# Altium PCB IoTC2.PcbDoc
Units mil, origin at the board's own origin, x right, y up, seen from the top; angles counter-clockwise.
Board outline 3295 x 3855 mil, 2 copper layers (Top Layer, Bottom Layer); 51 components, 63 nets, 229 pads, 85 vias.
Unrouted connection lines stored in the file: 2.
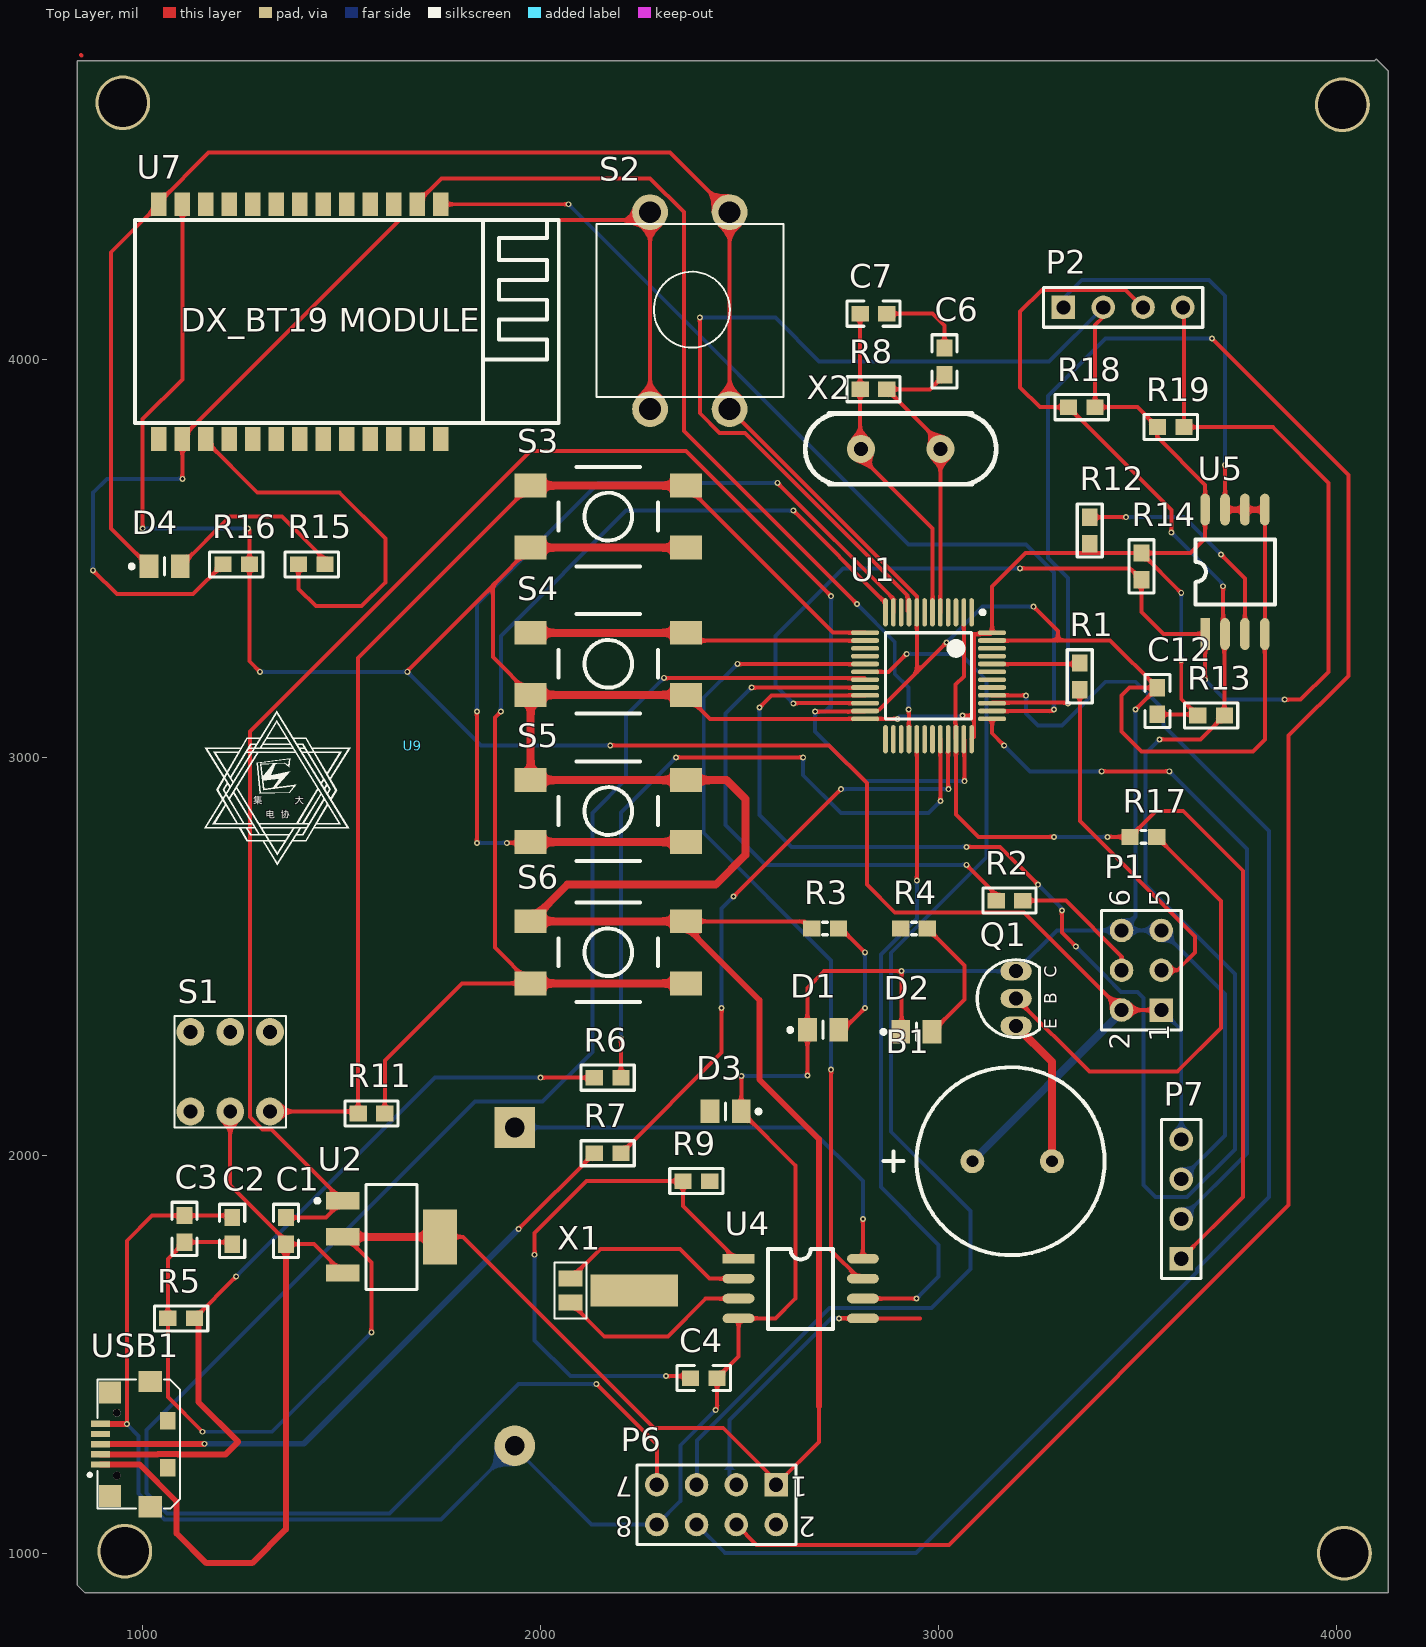
[diagram p0: Top Layer view]
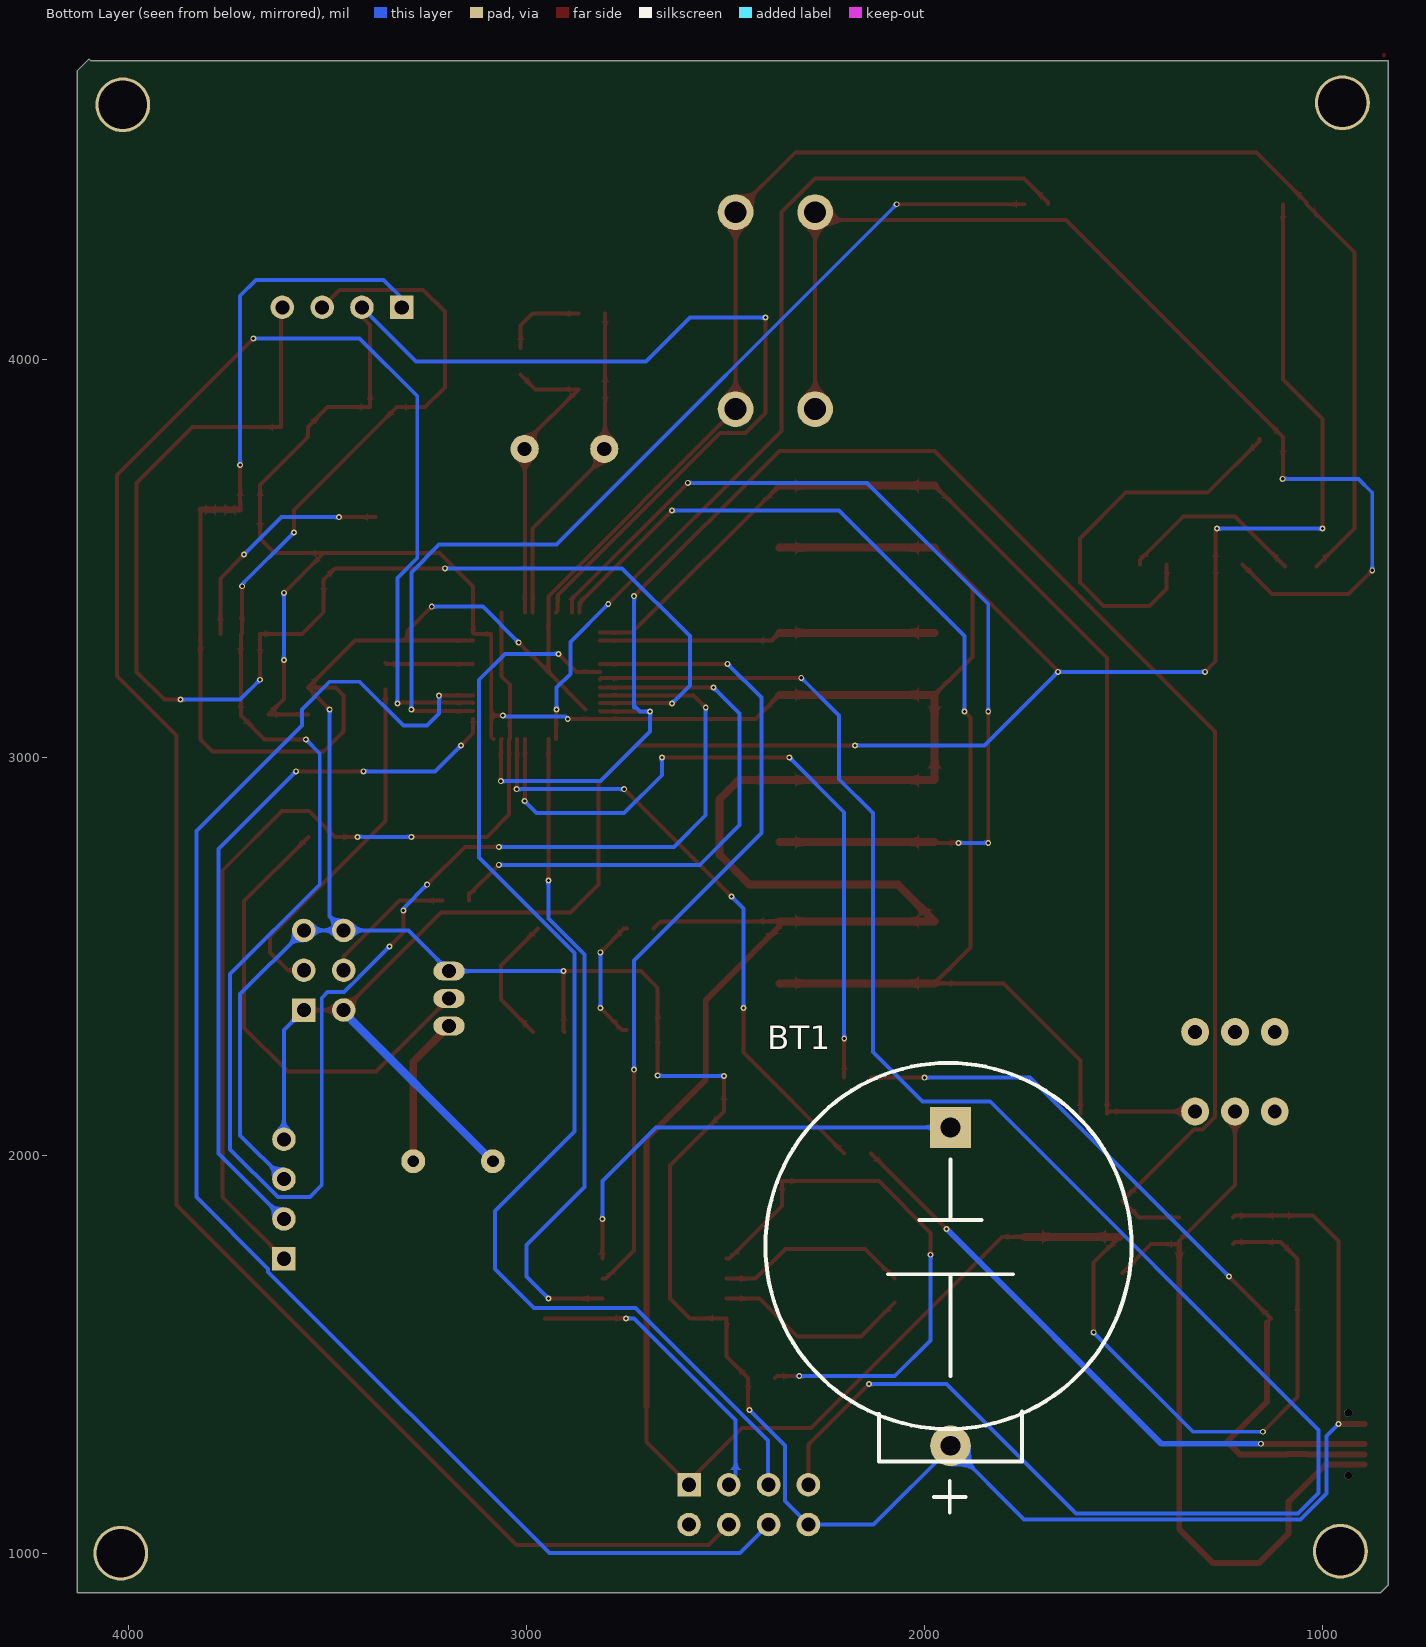
[diagram p1: Bottom Layer view, seen from below]
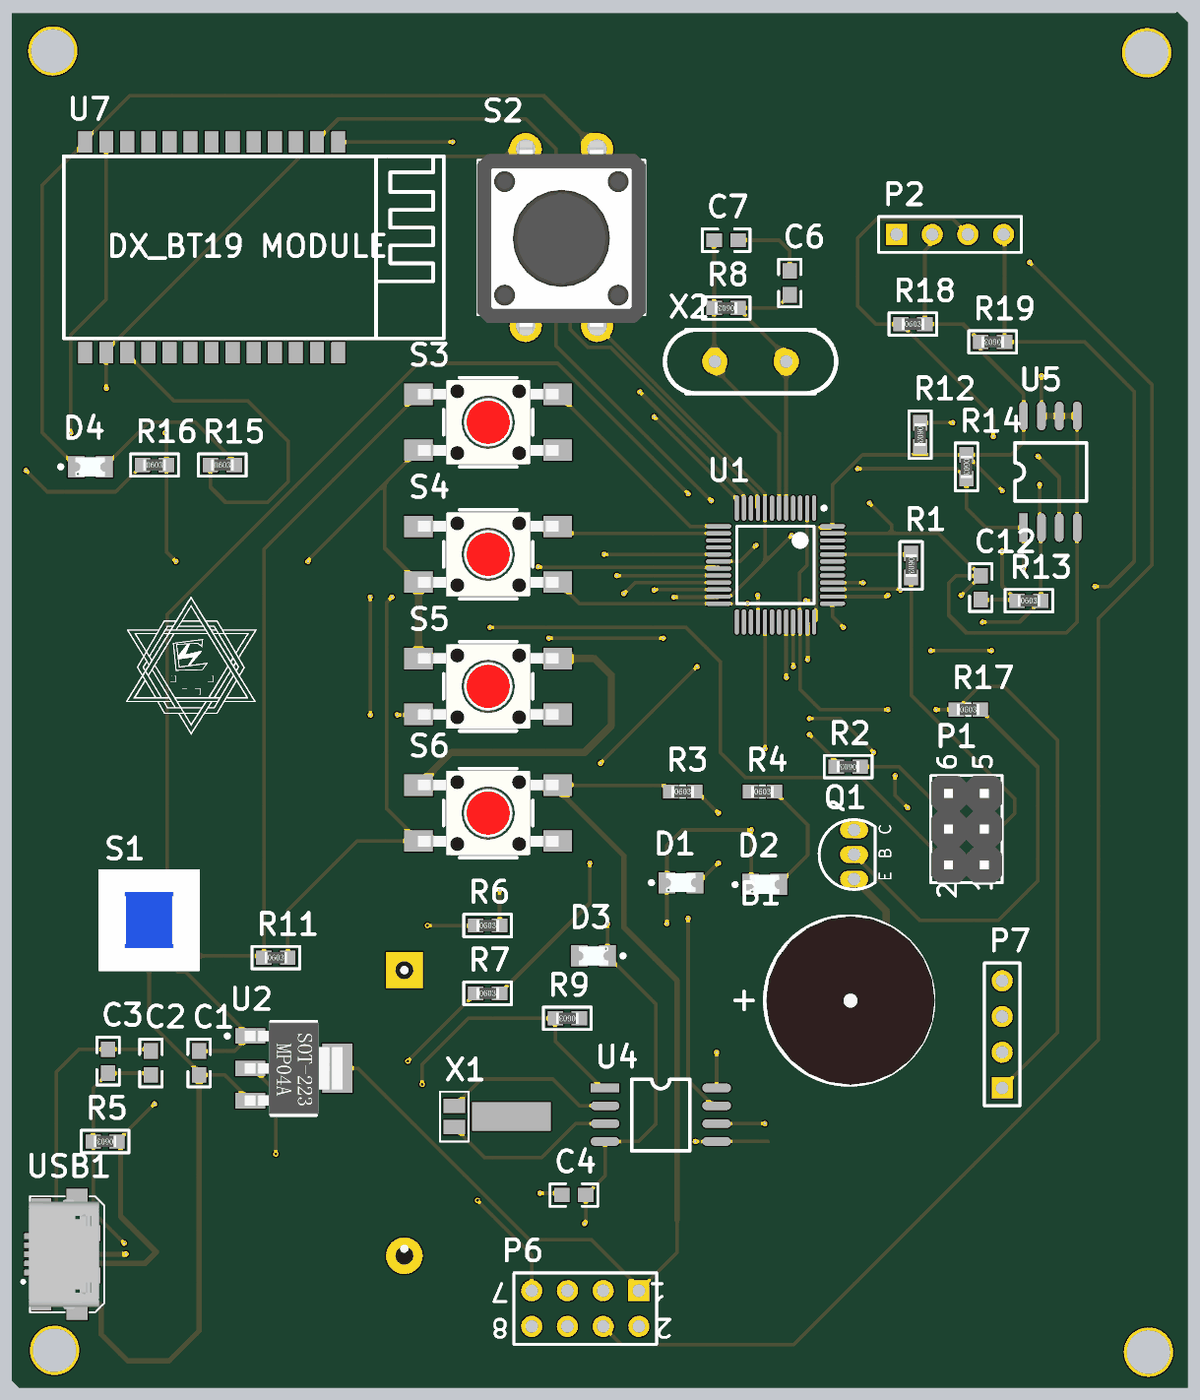
[diagram p2: 3D render of the assembled board from above, using the file's embedded part models]

## Layer stack, top to bottom
Top Solder: solder mask 0.4, Solder Resist, Dk 3.5
Top Layer: signal copper 1.4
Dielectric 1: dielectric 12.6, FR-4, Dk 4.8
Bottom Layer: signal copper 1.4
Bottom Solder: solder mask 0.4, Solder Resist, Dk 3.5

## Board outline
835,4750 4065,4750 4095,4750 4100,4755 4130,4725 4130,900 855,900 835,920

## Design rules (kind name [scope] priority, off if disabled: settings)
Clearance [All] p1: gap=5
HoleToHoleClearance [All] p1: gap=5 allowstackedmicrovias=TRUE
MinimumSolderMaskSliver [All] p1: minsoldermaskwidth=5
PolygonConnect [All] p1: connectstyle=Relief reliefconductorwidth=10 reliefentries=4 polygonreliefangle="90 Angle" airgapwidth=10
RoutingVias [All] p1: holewidth=28 width=50 viastyle="Through Hole" minholewidth=28 minwidth=50 maxholewidth=28 maxwidth=50
SilkToSilkClearance [All] p1: silktosilkclearance=5
SilkToSolderMaskClearance [IsPad] p1: minsilkscreentomaskgap=5 clearancetoexposedcopper=TRUE
SolderMaskExpansion [All] p1: expansion=4
Width [All] p1: maxlimit=50 minlimit=10 preferedwidth=10
26 further rules are at their usual default settings.

## Components (designator, comment, footprint, x,y, rotation, side; value= is the part's Value field where it differs from the comment)
B1 "Buzzer" BUZZER 3185,1985 r270 top
BT1 "3V" BAT-CR2032 1935,1670 r180 bottom
C1 "104" CAPC1608[0603]S 1360,1810 r270 top
C2 "104" CAPC1608[0603]S 1225,1810 r270 top
C3 "104" CAPC1608[0603]S 1105,1815 r270 top
C4 "104" CAPC1608[0603]S 2410,1440 r180 top
C6 "20p" CAPC1608[0603]S 3015,3995 r270 top
C7 "20p" CAPC1608[0603]S 2836.54,4115 r180 top
C12 "104" CAPC1608[0603]S 3550,3141.54 r90 top
D1 "Red" LEDC2012(0805) 2710,2315 r0 top
D2 "Red" LEDC2012(0805) 2944.37,2310 r0 top
D3 "Red" LEDC2012(0805) 2465,2110 r180 top
D4 "Red" LEDC2012(0805) 1055,3480 r0 top
P1 "BOOT MODE" HDR2X3 3560,2365 r90 top
P2 "Comment" HDR1X4 3314,4131 r0 top
P6 "Comment" HDR2X4 2592,1172 r180 top
P7 "Header 4" HDR1X4 3610,1740 r90 top
Q1 "S8550" TO-92B 3195,2394.9 r0 top
R1 "100K" RESC1608[0603]S 3355,3203.46 r270 top
R2 "1K" RESC1608[0603]S 3178.46,2640 r180 top
R3 "1K" RESC1608[0603] 2715,2570 r0 top
R4 "1K" RESC1608[0603] 2938.46,2570 r0 top
R5 "1.5K" RESC1608[0603]S 1096.54,1590 r180 top
R6 "10" RESC1608[0603]S 2168.46,2195 r0 top
R7 "10" RESC1608[0603]S 2168.46,2005 r0 top
R8 "1M" RESC1608[0603]S 2836.54,3925 r180 top
R9 "2K" RESC1608[0603]S 2391.54,1935 r180 top
R11 "1K" RESC1608[0603]S 1575,2105 r0 top
R12 "10K" RESC1608[0603]S 3380,3570 r270 top
R13 "10K" RESC1608[0603]S 3685,3105 r0 top
R14 "10K" RESC1608[0603]S 3510,3480 r270 top
R15 "330" RESC1608[0603]S 1425,3485 r0 top
R16 "10K" RESC1608[0603]S 1235,3485 r0 top
R17 "1K" RESC1608[0603] 3515,2800 r0 top
R18 "10K" RESC1608[0603]S 3360,3880 r0 top
R19 "10K" RESC1608[0603]S 3583.46,3830 r180 top
S1 "HEXAGON SELF-LOCKING SWITCH" 六脚开关 1120,2110 r90 top
S2 "SWITCH" 大复位按键 2275,3875 r90 top
S3 "SWITCH" 贴片复位开关 2170,3605 r0 top
S4 "SWITCH" 贴片复位开关 2170,3235 r0 top
S5 "SWITCH" 贴片复位开关 2170,2865 r180 top
S6 "SWITCH" 贴片复位开关 2170,2510 r180 top
U1 "STM32F103C8T6" 48P 2975,3205 r270 top
U2 "AMS1117_3.3V" SOT223 1625,1795 r0 top
U4 "DS1302" SO-8M 2497.4,1740 r0 top
U5 "LM75" SO-8M 3670,3310 r90 top
U7 "DX_BT19" DX_BT19 1895.64,4500 r270 top
U9 "电协logo" 电协logo 1679,3029 r0 top
USB1 "USB-5P" MICRO_USB 894,1274 r90 top
X1 "XTAL1" XTAL32-2 2075,1690 r270 top
X2 "XTAL2" XTAL1 3005,3775 r180 top

## Footprints (in the part's own frame and the unit in brackets; to place one, negate y for a bottom-side part, rotate by r counter-clockwise, add the part's x,y. Pads: shape width x height; smd on the part's side, far side on the other; paste and mask are expansions set on the pad)
48P [mm]
  oval 1.8x0.3 smd: 1(-4.05,2.75) 2(-4.05,2.25) 3(-4.05,1.75) 4(-4.05,1.25) 5(-4.05,0.75) 6(-4.05,0.25) 7(-4.05,-0.25) 8(-4.05,-0.75) 9(-4.05,-1.25) 10(-4.05,-1.75) 11(-4.05,-2.25) 12(-4.05,-2.75) 25(4.05,-2.75) 26(4.05,-2.25) 27(4.05,-1.75) 28(4.05,-1.25) 29(4.05,-0.75) 30(4.05,-0.25) 31(4.05,0.25) 32(4.05,0.75) 33(4.05,1.25) 34(4.05,1.75) 35(4.05,2.25) 36(4.05,2.75)
  oval 0.3x1.8 smd: 13(-2.75,-4.05) 14(-2.25,-4.05) 15(-1.75,-4.05) 16(-1.25,-4.05) 17(-0.75,-4.05) 18(-0.25,-4.05) 19(0.25,-4.05) 20(0.75,-4.05) 21(1.25,-4.05) 22(1.75,-4.05) 23(2.25,-4.05) 24(2.75,-4.05) 37(2.75,4.05) 38(2.25,4.05) 39(1.75,4.05) 40(1.25,4.05) 41(0.75,4.05) 42(0.25,4.05) 43(-0.25,4.05) 44(-0.75,4.05) 45(-1.25,4.05) 46(-1.75,4.05) 47(-2.25,4.05) 48(-2.75,4.05)
  silkscreen extent -4.17,-2.75 2.75,3.58, body extent -3.5,-3.5 3.5,3.5, height 1.6
BAT-CR2032 [mm] "CR2032电池座（未加焊）"
  round 2.6 hole 1.27: 1(0,-10.16)
  rect 2.6x2.6 hole 1.27: 2(0,10.16)
  silkscreen extent -11.81,-14.43 11.56,14.27, body extent -11.68,-11.18 11.68,14.22, height 3.5
BUZZER [mil]
  round 60 hole 30: 1(0,100) 2(0,-100)
  silkscreen extent -236,-323 236,232, body extent -236,-236 236,236, height 236
CAPC1608[0603]S [mm] "Chip Capacitor,Silkscreen Border,2-Leads, Body 1.60x0.80mm, IPC Medium Density"
  rect 1.1x1 smd: 1(-0.85,0) 2(0.85,0)
  silkscreen extent -1.7,-0.8 1.7,0.8, body extent -0.88,-0.48 0.87,0.47, height 0.85
DX_BT19 [mil]
  rect 60x39.37 smd: 1(110,-146.28) 2(110,-205.34) 3(110,-264.4) 4(110,-323.46) 5(110,-382.52) 6(110,-441.58) 7(110,-500.64) 8(110,-559.7) 9(110,-618.76) 10(110,-677.82) 11(110,-736.88) 12(110,-795.94) 13(110,-855) 14(700,-855) 15(700,-795.94) 16(700,-736.88) 17(700,-677.82) 18(700,-618.76) 19(700,-559.7) 20(700,-500.64) 21(700,-441.58) 22(700,-382.52) 23(700,-323.46) 24(700,-264.4) 25(700,-205.34) 26(700,-146.28)
  silkscreen extent 150,-915 660,150
HDR1X4 [mm] "Connector; Header; 4 Position"
  rect 1.5x1.5 hole 0.9: 1(0,0)
  round 1.5 hole 0.9: 2(2.54,0) 3(5.08,0) 4(7.62,0)
  silkscreen extent -1.27,-1.27 8.89,1.27
HDR2X3 [mm] "Connector; Header; 3x2 Position"
  rect 1.5x1.5 hole 0.9: 1(0,0)
  round 1.5 hole 0.9: 2(0,2.54) 3(2.54,0) 4(2.54,2.54) 5(5.08,0) 6(5.08,2.54)
  silkscreen extent -1.27,-1.27 6.35,3.81, body extent -1.27,-1.27 6.35,3.81, height 8.54
HDR2X4 [mm] "Connector; Header; 4x2 Position"
  rect 1.5x1.5 hole 0.9: 1(0,0)
  round 1.5 hole 0.9: 2(0,2.54) 3(2.54,0) 4(2.54,2.54) 5(5.08,0) 6(5.08,2.54) 7(7.62,0) 8(7.62,2.54)
  silkscreen extent -1.27,-1.27 8.89,3.81
LEDC2012(0805) [mm] "LED,Chip;2.00mm L X 1.25mm W X 1.20mm H"
  rect 1.2x1.5 smd: A(1,0) C(-1,0)
  silkscreen extent -2.22,-0.55 0,0.55, body extent -1.05,-0.68 1.05,0.67, height 1.2
MICRO_USB [mm]
  rect 1.35x1.5 smd: 0(-4,-3.16) 0(4,-3.16)
  rect 1.4x1.4 smd: 0(-3.3,-0.6) 0(3.3,-0.6)
  round 0.5 hole 0.5 paste+0 mask+0: 0(-2.007,-1.041) 0(2.007,-1.041)
  rect 1.1x1 smd: 0(-1.5,-4.3) 0(1.5,-4.3)
  rect 0.4x1.2 smd: 1(-1.3,0) 2(-0.65,0) 3(0,0) 4(0.65,0) 5(1.3,0)
  silkscreen extent -4.11,-5.08 4.11,0.79, body extent -3.9,-4.72 3.9,0.28, height 2.83
RESC1608[0603] [mm] "Chip Resistor, 2-Leads, Body 1.60x0.82mm, IPC Medium Density"
  rect 1.1x1 smd: 1(-0.85,0) 2(0.85,0)
  silkscreen extent -0.15,-0.4 0.15,0.4, body extent -0.8,-0.4 0.8,0.4, height 0.45
RESC1608[0603]S [mm] "Silkscreen Outside, Chip Resistor, 2-Leads, Body 1.60x0.82mm, IPC Medium Density"
  rect 1.1x1 smd: 1(-0.85,0) 2(0.85,0)
  silkscreen extent -1.7,-0.8 1.7,0.8, body extent -0.8,-0.4 0.8,0.4, height 0.45
SO-8M [mil]
  rect 80x24 smd: 1(0,0)
  oval 80x24 smd: 2(0,-50) 3(0,-100) 4(0,-150) 5(312.6,-150) 6(312.6,-100) 7(312.6,-50) 8(312.6,0)
  silkscreen extent 74,-176 237,24
SOT223 [mm]
  rect 2.15x1.1 smd: 1(-3.1,2.3) 2(-3.1,0) 3(-3.1,-2.3)
  rect 2.15x3.5 smd: 2(3.1,0)
  silkscreen extent -4.85,-3.35 1.63,3.35, body extent -3.48,-3.25 3.48,3.25, height 1.7
TO-92B [mm]
  oval 2x1.2 hole 0.9: 1(0,-1.775) 2(0,-0.025) 3(0,1.725)
  silkscreen extent -2.48,-2.51 1.5,2.46, body extent -2.48,-2.52 1.5,2.47, height 7
XTAL1 [mm]
  round 1.8 hole 0.9: 1(0,0) 2(5.08,0)
  silkscreen extent -3.56,-2.26 8.64,2.26
XTAL32-2 [mil]
  rect 80x220 smd: 0(30,160)
  rect 40x60 smd: 1(0,0) 2(60,0)
  silkscreen extent -40,-40 100,40
六脚开关 [mil]
  round 70 hole 35: 1(0,0) 2(0,-100) 3(0,-200) 4(200,-200) 5(200,-100) 6(200,0)
  silkscreen extent -40,-240 240,40, body extent -38,-238 238,38, height 512
大复位按键 [mil]
  round 90 hole 55: 1(0,0) 1(495,0) 2(0,-200) 2(495,-200)
  silkscreen extent 30,-335 465,135, body extent -28,-336 518,136, height 335
电协logo [mil]
  silkscreen extent -525,-300 -157,89
贴片复位开关 [mil]
  rect 80x60 smd: 1(-195,78) 1(195,78) 2(-195,-78) 2(195,-78)
  silkscreen extent -125,-125 125,125, body extent -197,-118 197,118, height 175

## Part data
BT1: library part "Battery Negtive", "Multicell Battery"
C1 C2 C3 C4 C6 C7 C12: library part "Cap Chip 2", "Chip Capacitor, Silkscreen Border"
D1 D2 D3 D4: library part "LED Chip", "Typical Chip LED"
P1: library part "Header 3X2", "Header, 3-Pin, Dual row"
P7: "Header, 4-Pin"
Q1: library part "PNP S8550", "Discrete PNP Bipolar Transistor"
R1 R2 R5 R6 R7 R8 R9 R11 R12 R13 R14 R15 R16 R18 R19: library part "Res Chip 2p 2", "Chip Resistor, Border Silkscreen On PCB Library"
R3 R4 R17: library part "Res Chip 2p 1", "Chip Resistor, PSpice Model, IPC PCB Library Drawing"
S1 U4 U5 U7 X1 X2: library part Component_1
S2 S3 S4 S5 S6: library part 轻触开关
U2: library part AMS1117, "POSITIVE OUTPUT VOLTAGE"
USB1: "微型USB母座"

## Free pads (board coordinates)
  round 137.8 hole 122.05: 0(950,4645) 0(955,1005) 0(4015,4640) 0(4020,1000)

## Via types
v1: diameter 15, hole 8, Top Layer to Bottom Layer, 85 vias

## Nets (pads, with @x,y where several pads share a name; then routed paths per layer and width w, separated by ;. In a path a pad name is that pad's centre, name@x,y a point inside that pad or via, vN(x,y) a via of type N, cw(c..) or ccw(c..) an arc to the next point about the centre after c; other vN are vias at no path point)
5V: C1.2 S1.2 U2.3 USB1.1 | length 1931.5
  Top Layer w10: S1.2 1220,1925 1360,1785 C1.2 1430.87,1776.54 U2.3
  Top Layer w15: USB1.1 992.18,1222.82 1085,1130 1085,1050 1160,975 1275,975 1360,1060 C1.2
BOOT0: R1.1 U1.44 | length 221.5
  Top Layer w10: U1.44 3352.6,3234.53 R1.1
BOOT1: R2.2 U1.20 | length 1425.2
  Top Layer w10: v1(2530.47,3175.47) U1.20 ; v1(3070,2730) 3145,2655 R2.2
  Bottom Layer w10: v1(2530.47,3175.47) 2465,3110 2465,2830 2565,2730 v1(3070,2730)
EN: P6.5 U1.18 | length 2966.9
  Top Layer w10: U1.18 2874.84,3214.84 v1(2920,3260)
  Bottom Layer w10: P6.5@2393,1195 2393,1283 2726,1616 2982,1616 3080,1714 3080,1860 2880,2060 2880,2508.79 3120,2748.79 3120,3195 3055,3260 v1(2920,3260)
GND: BT1.1 C1.1 C2.1 C3.1 C4.1 C12.2 D1.C D2.C D3.C D4.C P1.5 P1.6 P2.1 P6.8 P7.3 Q1.3 S2.2 U1.8 U1.23 U1.35 U1.47 U2.1 U4.4 U5.4 U5.5 U5.6 U5.7 U7.13 USB1.5 | length 18387.1
  Top Layer w10: v1@959.82,1325.18 v1(960,1325) 960,1785 1023.46,1848.46 C3.1 1220,1848.46 C2.1 ; D4.C 920,3575.63 920,4269.36 U7.13 1040.64,4394.77 1165.87,4520 2325,4520 2475,4370 2475,3875 2945.47,3404.53 U1.8 2945.47,3214 ; C1.1 1460.87,1843.46 U2.1 1323.5,2065 1301.36,2065 1270,2096.36 1270,3065 1975,3770 2365,3770 v1(2730,3405) ; v1(2440,1360) 2443.46,1363.46 C4.1 2497.4,1493.94 U4.4 2590,1590 2640,1640 2640,1974.37 D3.C v1(2504.37,2199.37) ; v1(2670.63,2200.63) D1.C 2670.63,2420.63 2712.8,2462.8 v1(2907.2,2462.8) 2907.2,2312.2 D2.C ; v1(2690,3115) 2814.13,3115 U1.23 ; 2851.67,3120.2 2945.47,3214 ; v1(3020,3288.53) 2945.47,3214 ; U1.35 3065,3044.13 v1(3065,2940) ; U1.47 3300,3293.58 ; v1(3238.53,3378.53) 3300,3317.06 3300,3293.58 ; v1(3495,3120) C12.2 ; U5.7 v1(3720,3735) ; U5.5 U5.4 3820,3045 3790,3015 3510,3015 3460,3065 3460,3155 3480,3175 C12.2 ; 3300,3293.58 3431.42,3293.58 C12.2
  Top Layer w15: USB1.5 v1@959.82,1325.18 ; U5.7 U5.6 U5.5
  Bottom Layer w10: v1(960,1325) 990,1295 990,1150 1055,1085 1750,1085 BT1.1 1935,1265 2128,1072 P6.8 2351,1131 2351,1271 v1(2440,1360) ; v1(2504.37,2199.37) 2669.37,2199.37 v1(2670.63,2200.63) ; v1(2730,3405) 2730,3125 2727.5,3127.5 2715,3115 v1(2690,3115) 2690,3065 2815,2940 v1(3065,2940) ; v1(2907.2,2462.8) Q1.3 3297.2,2565 P1.6 ; v1(3020,3288.53) 3110,3378.53 v1(3238.53,3378.53) ; P2.1@3310,4120 3310,4150 3360,4200 3680,4200 3720,4160 v1(3720,3735) ; v1(3495,3120) 3495,2600 P1.6 ; P7.3 3720,2050 3720,2405 P1.5 P1.6
I/O: U1.29 U4.6 | length 1660.9
  Top Layer w10: U4.6 v1(2945,1640) ; v1(2945.47,2690.47) U1.29
  Bottom Layer w10: v1(2945,1640) 3000,1695 3000,1775 2855,1920 2855,2505 2945.47,2595.47 v1(2945.47,2690.47)
IO0: P6.4 U1.39 | length 5603
  Top Layer w10: P6.4 2543,1021 3026,1021 3880,1875 3880,3055 4030,3205 4030,3710 v1(3687,4053) ; U1.39 3135.85,3137.5 3322.5,3137.5 v1(3325,3135)
  Bottom Layer w10: v1(3325,3135) 3325,3451.21 3275,3501.21 3275,3908 3420,4053 v1(3687,4053)
IO2: P6.6 U1.40 | length 3741
  Top Layer w10: U1.40 3219.21,3155.79 v1(3220,3155)
  Bottom Layer w10: P6.6 2464,1000 2943.2,1000 3649.53,1706.33 3649.53,1714.53 3830,1895 3830,2815 3565,3080 3565,3120 3495,3190 3420,3190 3310,3080 3250,3080 3220,3110 v1(3220,3155)
KEY1: R16.1 S2.1 U7.15 | length 2826.3
  Top Layer w10: v1(875,3470) 935,3410 1126.54,3410 R16.1 ; v1(1100,3700) 1099.7,3700.3 U7.15 1099.7,3804.77 1644.93,4350 2255,4350 2275,4370 S2.1@2275,3875
  Bottom Layer w10: v1(875,3470) 875,3665 910,3700 v1(1100,3700)
LM75_OS: B1.2 C2.2 C3.2 C12.1 P1.1 P1.2 P2.2 P6.1 P7.4 R3.1 R5.2 R12.2 R13.1 R14.1 R16.2 R18.2 R19.2 S3.2 S4.2 S5.2 S6.2 U1.9 U1.24 U1.36 U1.48 U2.2 U5.8 U7.12 | length 18522.3
  Top Layer w10: v1(1000,3575) 1000,3850 1099.7,3949.7 U7.12 ; v1(1150,1305.16) 1063.07,1392.09 R5.2 1063.07,1739.61 C3.2 1220,1781.54 C2.2 ; v1(1265,3575) 1268.46,3571.54 R16.2 1268.46,3241.54 v1(1295,3215) ; U2.2@1502.95,1795 1510,1795 1575,1730 v1(1575,1555) ; v1@1665,3217 1880,3432 ; U2.2@1747.05,1795 1805,1795 2285,1315 2459,1315 2596,1178 P6.1@2596,1176 ; S4.2@1975,3157 1880,3252 1880,3432 ; S3.2@1975,3527 1880,3432 ; v1(2175,3030) 2725,3030 2820,2935 2820,2680 2890,2610 3215,2610 P1.2 P1.1 ; S6.2@2365,2575 2365,2588 2663.54,2588 R3.1 ; S4.2@2365,3157 2425.27,3096.73 U1.24 v1(2896.73,3096.73) ; v1(2400,4105) 2400,3865 2450,3815 2513.79,3815 2922.01,3406.78 2922.01,3368.23 U1.9 ; P6.1 P6.1@2596,1176 ; P6.1@2596,1163 P6.1@2596,1176 ; 2699.25,1369.25 2699.25,1279.25 P6.1@2596,1176 ; v1(3060,3105) 3089.02,3105 ; U1.36 3089.02,3051.3 3089.02,3105 ; P2.2 3414,4107.07 3393.46,4086.54 R18.2 3500,3880 R19.2 3550,3805 3670,3685 U5.8 3670,3550 3633.46,3513.46 R14.1 ; C12.1 3648.46,3108.07 3610,3146.54 v1(3610,3245) ; v1(3610,3413.46) R14.1 ; 3089.02,3105 3089.02,3309.49 3130.67,3309.49 U1.48 3134.45,3429.2 3218.72,3513.46 R14.1
  Top Layer w15: S6.2@2365,2575 2550,2390 2550,2190 2699.25,2040.75 2699.25,1369.25
  Top Layer w20: U2.2@1510,1795 U2.2@1747.05,1795 ; S3.2@1975,3527 S3.2@2365,3527 ; S6.2@2365,2588 1975,2588 2067,2680 2440,2680 2515,2755 2515,2895 2467,2943 2365,2943 1975,2943 1975,3157 S4.2@2365,3157
  Bottom Layer w10: v1(1000,3575) v1(1265,3575) ; v1@1155,1305.16 1325.16,1305.16 v1(1575,1555) ; v1(1295,3215) v1(1665,3215) 1850,3030 v1(2175,3030) ; v1(2400,4105) 2590,4105 2700,3995 3278,3995 P2.2 ; v1(2896.73,3096.73) 2902.5,3102.5 3057.5,3102.5 v1(3060,3105) ; P1.2@3460,2360 P1.2 ; P1.1 3610,2315 P7.4 ; v1(3610,3245) v1(3610,3413.46)
  Bottom Layer w20: B1.2 P1.2@3460,2360
NetB1_1: B1.1 Q1.1 | length 377.3
  Top Layer w20: Q1.1 3285,2235 B1.1
NetBT1_2: BT1.2 U4.8 | length 1133
  Top Layer w10: U4.8 v1(2810,1840)
  Bottom Layer w10: BT1.2@1930,2065 BT1.2 2675,2070 2810,1935 v1(2810,1840)
NetC4_2: C4.2 R9.2 U4.1 | length 1389.9
  Top Layer w10: v1(1985,1750) 1985,1805 2115,1935 R9.2 2358.07,1871.93 2490,1740 U4.1 ; v1(2315,1445) 2371.54,1445 C4.2
  Bottom Layer w10: v1(1985,1750) 1985,1535 2075,1445 v1(2315,1445) v1@2320,1445
NetC6_1: C6.1 C7.1 | length 214
  Top Layer w10: C7.1 2985,4115 3015,4085 C6.1
NetD1_A: D1.A R3.2 | length 319.8
  Top Layer w10: R3.2 2755,2570 v1(2815,2510) ; D1.A 2760,2315 v1(2815,2370)
  Bottom Layer w10: v1(2815,2370) v1(2815,2510)
NetD2_A: D2.A R4.2 | length 332.2
  Top Layer w10: R4.2 3065,2476.93 3065,2391.26 D2.A
NetD3_A: D3.A R9.1
NetD4_A: D4.A R15.2 | length 472.3
  Top Layer w10: D4.A 1219.37,3605 1350,3605 1458.46,3496.54 R15.2
NetP1_3: P1.3 R1.2 | length 883.8
  Top Layer w10: R1.2 3355,2840 3645,2550 3645,2510 3600,2465 P1.3
NetP1_4: P1.4 R2.1 | length 341.1
  Top Layer w10: R2.1 3320,2640 3460,2500 P1.4
NetQ1_2: Q1.2 R17.2 | length 1183.6
  Top Layer w10: Q1.2 3378.9,2210 3600,2210 3710,2320 3710,2638.46 R17.2
NetR5_1: R5.1 R6.1 USB1.2 | length 1970.8
  Top Layer w10: R5.1@1140,1580 R5.1 v1(1235,1695) ; v1(2000,2195) R6.1
  Top Layer w15: USB1.2 1037.74,1248.41 1038.43,1249.1 1088.15,1249.1 1088.84,1248.41 1208.41,1248.41 1240,1280 1140,1380 R5.1@1140,1580
  Bottom Layer w10: v1(1235,1695) 1735,2195 v1(2000,2195)
NetR7_1: R7.1 USB1.3 | length 1545.2
  Top Layer w10: USB1.3 USB1.3@895,1275 ; v1@1154,1274 v1(1155,1275) ; v1(1945,1815) R7.1
  Top Layer w15: USB1.3 v1@1154,1274
  Bottom Layer w15: v1(1155,1275) 1405,1275 v1(1945,1815)
NetR12_1: R12.1 U5.3 | length 593.6
  Top Layer w10: R12.1 v1(3471.54,3603.46) ; v1(3710,3510) 3770,3450 U5.3
  Bottom Layer w10: v1(3471.54,3603.46) 3616.54,3603.46 v1(3710,3510)
NetR15_1: R15.1 U7.16 | length 990.4
  Top Layer w10: U7.16 1158.76,3795.23 1288.99,3665 1495,3665 1610,3550 1610,3440 1550,3380 1435,3380 1391.54,3423.46 R15.1
NRST: 
OSCIN: C6.2 R8.1 U1.5 X2.1 | length 784.7
  Top Layer w10: X2.1@2985,3775 3004.53,3755.47 U1.5 ; X2.1 3005,3790 R8.1 2978.46,3925 C6.2
OSCOUT: C7.2 R8.2 U1.6 X2.2 | length 834.3
  Top Layer w10: X2.2@2785,3775 2985,3575 2985,3364.61 U1.6 ; C7.2 R8.2 2803.07,3776.93 X2.2
PA0: U1.10
PA1: S5.1 U1.11 | length 2453.4
  Top Layer w10: v1(1840,2785) v1(1840,3115) ; v1(1915,2785) 1973,2785 S5.1@1975,2787 ; v1(2595,3690) 2886.42,3398.58 U1.11
  Top Layer w20: S5.1@1975,2787 S5.1@2365,2787
  Bottom Layer w10: v1(1840,2785) v1(1915,2785) ; v1(1840,3115) 1840,3385 2145,3690 v1(2595,3690)
PA2: R11.2 S6.1 U1.12 | length 3103.7
  Top Layer w10: R11.2 1608.46,2238.46 1802,2432 1975,2432 1885,2522 1885,3100 v1(1900,3115) ; v1(2635,3620) 2866.73,3388.27 U1.12
  Top Layer w20: S6.1@1975,2432 S6.1@2365,2432
  Bottom Layer w10: v1(1900,3115) 1900,3305 2215,3620 v1(2635,3620)
PA3: R11.1 S1.3 S3.1 U1.13 | length 2974.9
  Top Layer w10: S1.3 1536.54,2110 R11.1 1541.54,3249.54 S3.1@1975,3683 ; S3.1@2365,3683 2734.73,3313.27 U1.13
  Top Layer w20: S3.1@1975,3683 S3.1@2365,3683
PA4: S4.1 U1.14 | length 848.6
  Top Layer w10: S4.1@2365,3313 2384.42,3293.58 U1.14
  Top Layer w20: S4.1@1975,3313 S4.1@2365,3313
PA5: U1.15
PA6: U1.16
PA7: U1.17 U4.7 | length 2072
  Top Layer w10: v1(2495,3235) 2495.47,3234.53 U1.17 ; v1(2730,2215) 2730,1760.89 2800.89,1690 U4.7
  Bottom Layer w10: v1(2495,3235) 2410,3150 2410,2810 2730,2490 v1(2730,2215)
PA9: U1.30
PA10: U1.31
PA11: R6.2 U1.32 | length 1782.4
  Top Layer w10: v1@2200,2295 v1(2201.93,2293.07) R6.2 ; v1(2340,3000) v1(2660,3000) ; U1.32 3004.53,2890.47 v1(3005,2890)
  Bottom Layer w10: v1(2201.93,2293.07) 2201.93,2861.93 v1(2340,3000) ; v1(2660,3000) 2660,2955 2755,2860 2975,2860 v1(3005,2890)
PA12: R7.2 U1.33 | length 1539.6
  Top Layer w10: R7.2 2455,2258.07 v1(2455,2370) ; v1(2485,2650) v1(2755,2920) ; v1@3024.21,2920 U1.33
  Bottom Layer w10: v1(2455,2370) 2455,2620 v1(2485,2650) ; v1(2755,2920) v1(3025,2920)
PA15: U1.38 U7.1 | length 2425.8
  Top Layer w10: U7.1 v1(2070,4390) ; U1.38 3286.42,3116.42 v1(3290,3120)
  Bottom Layer w10: v1(2070,4390) 2925,3535 3220,3535 3290,3465 v1(3290,3120)
PB1: P6.7 U1.19 | length 4797.3
  Top Layer w10: v1(2140,1425) 2292,1273 P6.7 ; v1(2310,3200) 2311.06,3198.94 2813.61,3198.94 2815.55,3197 U1.19
  Bottom Layer w10: v1(2140,1425) 1945,1425 1620,1100 1061.21,1100 1010,1151.21 1010,1310 1835,2135 2005,2135 2130,2260 2130,2860 2215,2945 2215,3105 v1(2310,3200)
PB2: P6.2
PB5: U1.41
PB6: U1.42
PB7: U1.43
PB8: U1.45
PB9: U1.46
PB10: P2.3 R13.2 R18.1 U1.21 U5.2 | length 5447.3
  Top Layer w10: v1(2550,3125) 2580.79,3155.79 U1.21 ; v1(3070,2775) 3155,2775 v1(3250,2680) ; v1(3310,2615) 3310,2560 v1(3345,2525) ; P2.3 3470,4175 3260,4175 3205,4120 3205,3930 3255,3880 R18.1 3585,3621.54 v1(3585,3565) ; v1(3555,3045) 3658.46,3045 R13.2 3718.46,3308.46 3715,3311.93 v1(3715,3430)
  Bottom Layer w10: v1(2550,3125) 2550,2855 2630,2775 v1(3070,2775) ; v1(3250,2680) 3310,2620 v1(3310,2615) ; v1(3345,2525) 3420.47,2449.53 3420.47,2448.63 3459.1,2410 3500,2410 3515,2395 3515,1925 3545,1895 3625,1895 3745,2015 3745,2455 3520,2680 3520,3010 v1(3555,3045) ; v1(3585,3565) 3715,3435 v1(3715,3430)
PB11: P2.4 R14.2 R19.1 U1.22 U5.1 | length 3309.2
  Top Layer w10: v1(2635,3135) 2636.1,3136.1 U1.22 ; v1(3205,3475) 3481.54,3475 R14.2 3510,3365 3565,3310 U5.1 v1(3670,3195) ; P2.4 3616.93,4128.07 R19.1 3840,3830 3980,3690 3980,3215 3910,3145 v1(3870,3145)
  Bottom Layer w10: v1(2635,3135) 2590,3180 2590,3305 2760,3475 v1(3205,3475) ; v1(3670,3195) 3720,3145 v1(3870,3145)
PB12: U1.25
PB13: U1.26
PB14: U1.27
PB15: U1.28 U7.2 | length 2293.4
  Top Layer w10: U7.2 1690.3,4394.77 1750.53,4455 2275,4455 2360,4370 2360,3820 v1(2795,3385) ; v1(2925,3120) 2925.79,3119.21 U1.28
  Bottom Layer w10: v1(2795,3385) 2890,3290 2890,3210 2925,3175 v1(2925,3120)
PC1: R4.1
PC12: P7.2 U1.37 | length 1795.4
  Top Layer w10: U1.37 3134.45,3060.55 v1(3165,3030) ; v1(3410,2965) v1(3580,2965)
  Bottom Layer w10: v1(3165,3030) 3230,2965 v1(3410,2965) ; v1(3580,2965) 3775,2770 3775,2005 P7.2
PC13: P7.1 R17.1 U1.2 U1.34 | length 2390.3
  Top Layer w10: U1.2 3063.58,3203.58 3042.5,3182.5 3042.5,3046.95 U1.34 3043.9,2856.1 3100,2800 v1(3290,2800) ; v1(3425,2800) R17.1 3546.54,2865 3615,2865 3765,2715 3765,1895 P7.1
  Bottom Layer w10: v1(3290,2800) v1(3425,2800)
PC14: U1.3
PC15: U1.4
RESET: P6.3 U1.7 U4.5 | length 724.6
  Top Layer w10: v1(2750,1590) U4.5 2954,1590
  Bottom Layer w10: P6.3@2475,1195 2475,1335 2730,1590 v1(2750,1590)
VBAT: U1.1
X1: U4.2 X1.1 | length 484.5
  Top Layer w10: X1.1 2150,1765 2350,1765 2425,1690 U4.2
X2: U4.3 X1.2 | length 497
  Top Layer w10: X1.2 2160,1545 2320,1545 2415,1640 U4.3
pads on no net: S1.1 S1.4 S1.5 S1.6 U7.3 U7.4 U7.5 U7.6 U7.7 U7.8 U7.9 U7.10 U7.11 U7.14 U7.17 U7.18 U7.19 U7.20 U7.21 U7.22 U7.23 U7.24 U7.25 U7.26 USB1.0 USB1.4 X1.0
copper on no net: | length 1.6
  Top Layer w10: 845,4765 846.1,4763.9

## Silkscreen, mask and mechanical layers (free items; w line width, h text height)
Mechanical 13:
  lines w30: 846.1,913.9 846.1,962.32 846.1,4755 4120,4755 4120,910 850,910

## Text inside footprints (layer, text, board x,y; h text height)
P1: Top Overlay "6" at 3480,2625 h50 r90; Top Overlay "5" at 3580,2625 h50 r90; Top Overlay "2" at 3480,2265 h50 r90; Top Overlay "1" at 3580,2285 h50 r90
P6: Top Overlay "8" at 2232,1092 h50 r180; Top Overlay "7" at 2232,1192 h50 r180; Top Overlay "1" at 2672,1192 h50 r180; Top Overlay "2" at 2692,1092 h50 r180
Q1: Top Overlay "E" at 3297.36,2316.16 h31.5 r90; Top Overlay "C" at 3297.36,2446.08 h31.5 r90; Top Overlay "B" at 3297.36,2379.15 h31.5 r90
U7: Top Overlay "DX_BT19 MODULE" at 1095.64,4070 h60
U9: Top Overlay "协" at 1346.35,2841.64 h30; Top Overlay "电" at 1309.35,2841.64 h30; Top Overlay "大" at 1382.35,2876.64 h30; Top Overlay "集" at 1277.35,2876.64 h30; Top Solder "集" at 1277.35,2876.64 h30; Top Solder "大" at 1382.35,2876.64 h30; Top Solder "电" at 1309.35,2841.64 h30; Top Solder "协" at 1346.35,2841.64 h30